# EAGLE board mainboard (EAGLE 9.6.2)
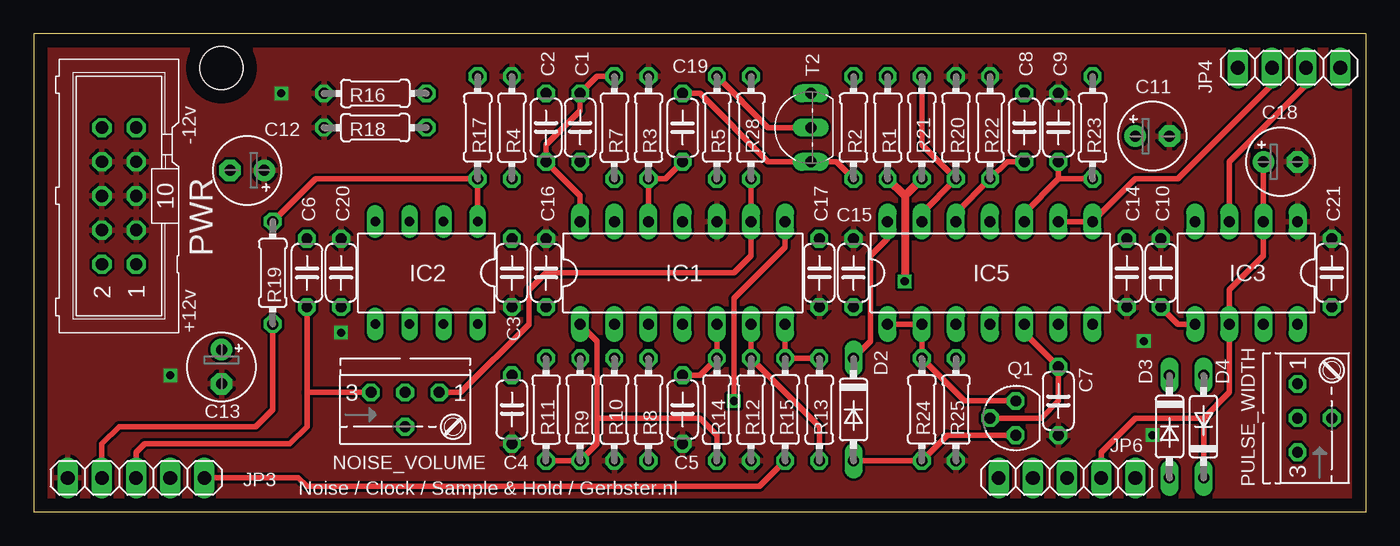
[diagram p0: board, top side]
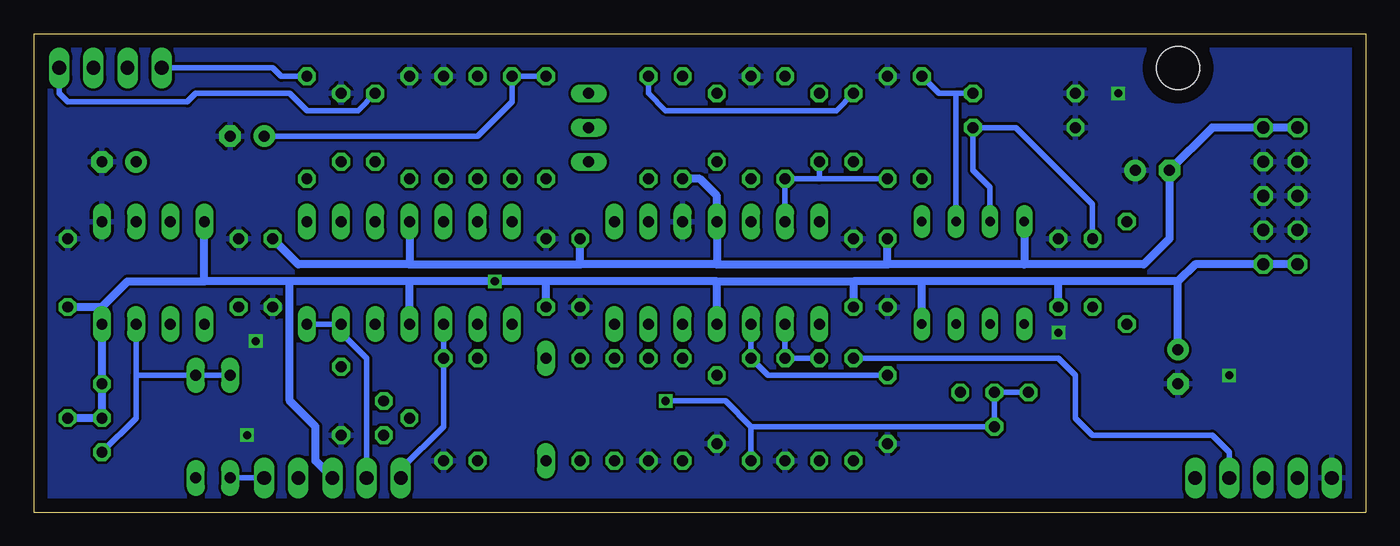
[diagram p1: board, bottom side, seen from below]

Size 99.06 x 35.56 mm. Coordinates in mm from the lower left corner, seen from the top.
Outline: 99.06,0 0,0 0,35.56 99.06,35.56 99.06,0
Copper layers (1*16): Top 0.035mm / dielectric 1.5mm / Bottom 0.035mm
Design rules "default": minimum track width 10mil, minimum drill 24mil, track to track 8mil, track to pad 8mil, pad to pad 8mil, via to via 8mil, smd to smd 8mil, copper to edge 40mil, drill to drill 8mil, minimum pad ring 10mil, minimum via ring 8mil, stop-mask expansion 4mil, vias tented up to drill 0mil, thermal gap 10mil
Holes 3.2 mm at 13.97,33.02

## Footprints (pad centres in the part's own frame; a part is rotated, then mirrored left to right if it is on the bottom)
C050-024X044 = drill 0.813 octagon: 1 -2.54,0; 2 2.54,0
E2,5-5 = drill 0.813 pad 1.6: + -1.27,0 | drill 0.813 pad 1.6 octagon: - 1.27,0
DO35-7 = drill 0.813 long: A 3.81,0; C -3.81,0
DIL14 = drill 0.813 long: 1 -7.62,-3.81; 2 -5.08,-3.81; 3 -2.54,-3.81; 4 0,-3.81; 5 2.54,-3.81; 6 5.08,-3.81; 7 7.62,-3.81; 8 7.62,3.81; 9 5.08,3.81; 10 2.54,3.81; 11 0,3.81; 12 -2.54,3.81; 13 -5.08,3.81; 14 -7.62,3.81
DIL08 = drill 0.7 long: 1 -3.81,-3.81; 2 -1.27,-3.81; 3 1.27,-3.81; 4 3.81,-3.81; 5 3.81,3.81; 6 1.27,3.81; 7 -1.27,3.81; 8 -3.81,3.81
DIL-08 = drill 0.813 long: 1 -3.81,-3.81; 2 -1.27,-3.81; 3 1.27,-3.81; 4 3.81,-3.81; 5 3.81,3.81; 6 1.27,3.81; 7 -1.27,3.81; 8 -3.81,3.81
1X05 = drill 1.016 long: 1 -5.08,0; 2 -2.54,0; 3 0,0; 4 2.54,0; 5 5.08,0
1X04 = drill 1.016 long: 1 -3.81,0; 2 -1.27,0; 3 1.27,0; 4 3.81,0
S64YW = drill 0.813 octagon: A 2.54,1.27; E -2.54,1.27; S 0,-1.27; S@1 0,1.27
ML10 = drill 0.914 octagon: 1 -5.08,-1.27; 2 -5.08,1.27; 3 -2.54,-1.27; 4 -2.54,1.27; 5 0,-1.27; 6 0,1.27; 7 2.54,-1.27; 8 2.54,1.27; 9 5.08,-1.27; 10 5.08,1.27
SOT54C = drill 0.813 octagon: D 1.27,0; G -1.27,0; S 0,1.905
0204/7 = drill 0.813 octagon: 1 -3.81,0; 2 3.81,0
TO92-EBC = drill 0.813 long: B 0,-1.27; C 2.54,-1.27; E -2.54,-1.27

## Placement (x,y rotation side)
C1  22pf  [C050-024X044]  40.64,28.57 90 top
C2  .1uf  [C050-024X044]  38.1,28.57 90 top
C3  [C050-024X044]  35.56,17.78 90 top
C4  0.1uf  [C050-024X044]  35.56,7.62 90 top
C5  0.22uf  [C050-024X044]  48.26,7.62 90 top
C6  0.1uf  [C050-024X044]  20.32,17.78 270 top
C7  0.1uf  [C050-024X044]  76.2,8.26 90 top
C8  0.001uf  [C050-024X044]  73.66,28.57 90 top
C9  0.1uf  [C050-024X044]  76.2,28.57 270 top
C10  0.022uf  [C050-024X044]  83.82,17.78 270 top
C11  1uf  [E2,5-5]  83.19,27.94 0 top
C12  [E2,5-5]  15.88,25.4 180 top
C13  [E2,5-5]  13.97,10.79 270 top
C14  [C050-024X044]  81.28,17.78 90 top
C15  [C050-024X044]  58.42,17.78 90 top
C16  [C050-024X044]  38.1,17.78 270 top
C17  [C050-024X044]  60.96,17.78 270 top
C18  1.0uf  [E2,5-5]  92.71,26.04 0 top
C19  .1uf  [C050-024X044]  48.26,28.57 270 top
C20  [C050-024X044]  22.86,17.78 270 top
C21  [C050-024X044]  96.52,17.78 90 top
D2  1N4148DO35-7  [DO35-7]  60.96,7.62 270 top
D3  [DO35-7]  84.45,6.35 270 top
D4  [DO35-7]  87,6.35 90 top
IC1  TL074P  [DIL14]  48.26,17.78 0 top
IC2  TL072P  [DIL08]  29.21,17.78 180 top
IC3  NE555  [DIL-08]  90.17,17.78 180 top
IC5  TL074P  [DIL14]  71.12,17.78 0 top
JP3  [1X05]  7.62,2.54 0 top
JP4  [1X04]  93.34,33.02 0 top
JP6  [1X05]  76.83,2.54 180 top
NOISE_VOLUME  500k  [S64YW]  27.62,7.62 0 top
PULSE_WIDTH  10k  [S64YW]  95.25,6.99 90 top
PWR  [ML10]  6.35,23.5 90 top
Q1  BF245  [SOT54C]  73.03,6.99 90 top
R1  470k  [0204/7]  63.5,28.57 270 top
R2  470k  [0204/7]  60.96,28.57 90 top
R3  2M  [0204/7]  45.72,28.57 270 top
R4  10k  [0204/7]  35.56,28.57 270 top
R5  10k  [0204/7]  50.8,28.57 90 top
R7  470k  [0204/7]  43.18,28.57 270 top
R8  10k  [0204/7]  45.72,7.62 270 top
R9  220k  [0204/7]  40.64,7.62 90 top
R10  15k  [0204/7]  43.18,7.62 270 top
R11  10k  [0204/7]  38.1,7.62 270 top
R12  15k  [0204/7]  53.34,7.62 270 top
R13  100k  [0204/7]  58.42,7.62 270 top
R14  10k  [0204/7]  50.8,7.62 270 top
R15  10k  [0204/7]  55.88,7.62 90 top
R16  15k  [0204/7]  25.4,31.11 180 top
R17  220k  [0204/7]  33.02,28.57 90 top
R18  10k  [0204/7]  25.4,28.57 0 top
R19  10k  [0204/7]  17.78,17.78 90 top
R20  10k  [0204/7]  68.58,28.57 90 top
R21  100k  [0204/7]  66.04,28.57 90 top
R22  100k  [0204/7]  71.12,28.57 270 top
R23  10k  [0204/7]  78.74,28.57 90 top
R24  1M  [0204/7]  66.04,7.62 90 top
R25  100k  [0204/7]  68.58,7.62 90 top
R28  10k  [0204/7]  53.34,28.57 90 top
T2  [TO92-EBC]  56.52,28.57 90 top

## Library data of the parts
C1-C21 R1-R5 R7-R25 R28 = resistor
D2-D4 = diode
IC1 IC5 = linear
IC2 = TomW
IC3 = st-microelectronics; MF: Arrow Electronics; MPN: NE555N; OC_FARNELL: 1467742; OC_NEWARK: 89K1486
JP3 JP4 JP6 = pinhead
NOISE_VOLUME PULSE_WIDTH = pot
PWR = con-ml; OC_FARNELL: unknown; OC_NEWARK: unknown
Q1 = transistor-small-signal
T2 = transistor-neu-to92

## Nets
+12V: C13.+ C16.2 C17.2 C20.2 C21.1 IC1.4 IC2.8 IC3.4 IC3.8 IC5.4 JP6.3 PULSE_WIDTH.A PULSE_WIDTH.S PWR.1 PWR.2 R1.2 R21.1
-12V: C3.2 C12.- C14.2 C15.2 IC1.11 IC2.4 IC5.11 PWR.9 PWR.10 R5.1
GND: C3.1 C4.1 C5.1 C7.1 C9.1 C10.1 C11.- C12.+ C13.- C14.1 C15.1 C16.1 C17.1 C18.- C20.1 C21.2 IC1.10 IC3.1 JP3.1 PWR.3 PWR.4 PWR.5 PWR.6 PWR.7 PWR.8 R3.1 R4.1 R10.2 R12.2 R16.2 R18.1 R20.2 R22.1 R25.1
M_BLUE_OUT: JP3.2 R19.1
M_CLK_CTRL_1: D3.A JP6.1
M_CLK_CTRL_2: C18.+ D4.C IC3.2 IC3.6 JP6.2
M_CLK_IN: C8.2 JP4.4
M_CLK_OUT: IC3.3 JP4.3
M_GLIDE_A: IC5.6 IC5.7 JP6.4
M_GLIDE_B: JP4.1 R23.2
M_PINK_OUT: JP3.4 R11.1
M_RED_OUT: JP3.5 R15.1
M_SH_OUT: IC5.8 IC5.9 JP4.2
M_SIGNAL_IN: IC5.3 JP6.5 R25.2
M_WHITE_OUT: C6.2 IC1.8 JP3.3 NOISE_VOLUME.E NOISE_VOLUME.S R8.2
N$1: C19.1 R2.1 T2.E
N$2: C11.+ R1.1 R2.2
N$3: R5.2 T2.B
N$4: C19.2 IC1.12 R3.2
N$5: C1.1 IC1.13 R4.2 R7.2
N$6: C1.2 C2.1 IC1.14 R7.1
N$7: C2.2 R28.2
N$10: C4.2 IC1.3 R8.1
N$11: IC1.2 R9.2 R10.1
N$12: IC1.1 R9.1 R11.2 R14.2
N$13: IC5.1 IC5.2 Q1.D R24.2
N$16: IC1.6 R12.1 R13.2
N$17: IC1.7 R13.1 R15.2
N$18: C5.2 IC1.5 R14.1
N$19: D3.C D4.A IC3.7 PULSE_WIDTH.E
N$20: C6.1 IC2.3 R18.2
N$21: IC2.2 R16.1 R17.2
N$22: IC2.1 R17.1 R19.2
N$23: C10.2 IC3.5
N$24: IC5.13 R20.1 R21.2
N$25: C8.1 IC5.12 R22.2
N$26: IC1.9 NOISE_VOLUME.A R28.1
N$29: D2.C IC5.14
N$30: D2.A Q1.G R24.1
N$31: C7.2 IC5.5 Q1.S
N$33: C9.2 IC5.10 R23.1

## Tracks (layer width: path | path; a pad name or v marks a point on that pad's centre or on a via)
+12V  (via drill 0.6)
  Top 0.61: R21.1 64.77,23.5 | 64.77,23.5 v64.77,17.14 | R1.2 64.77,23.5
  Bottom 0.61: C13.+ 13.97,17.14 | PWR.2 PWR.1 12.7,18.41 13.97,17.14 | 13.97,17.14 22.86,17.14 | C20.2 22.86,17.14 | 22.86,17.14 33.02,17.14 | IC2.8 33.02,17.14 | 33.02,17.14 38.1,17.14 | 38.1,17.14 C16.2 | 48.26,17.14 38.1,17.14 | IC1.4 48.26,17.14 | 48.26,17.14 60.96,17.14 | C17.2 60.96,17.14 | 60.96,17.14 v64.77,17.14 71.12,17.14 | IC5.4 71.12,17.14 | 71.12,17.14 80.01,17.14 | 80.01,17.14 86.36,17.14 | 86.36,17.14 IC3.4 | 93.98,15.24 92.08,17.14 86.36,17.14 | 93.98,15.24 IC3.8 PULSE_WIDTH.A 93.98,6.99 PULSE_WIDTH.S | 93.98,15.24 C21.1 | JP6.3 78.11,3.81 78.11,6.35 80.01,8.26 80.01,17.14
-12V
  Bottom 0.61: PWR.10 PWR.9 11.43,28.57 C12.- 14.61,20.32 16.51,18.41 25.4,18.41 | IC2.4 25.4,18.41 | 25.4,18.41 35.56,18.41 | 35.56,18.41 C3.2 | 48.26,18.41 35.56,18.41 | 48.26,18.41 IC1.11 48.26,23.5 49.53,24.77 R5.1 | 48.26,18.41 58.42,18.41 | 58.42,18.41 C15.2 | 71.12,18.41 58.42,18.41 | IC5.11 71.12,18.41 | 71.12,18.41 79.38,18.41 C14.2
GND  (via drill 0.6)
  other vias: 18.41,31.11 10.16,10.16 22.86,13.34 82.55,12.7 83.19,5.71
  pour Top: 0,35.56 0,0 99.06,0 99.06,35.56
  pour Bottom: 0,35.56 0,0 99.06,0 99.06,35.56
M_BLUE_OUT
  Top 0.406: R19.1 17.78,7.62 16.51,6.35 6.35,6.35 5.08,5.08 JP3.2
M_CLK_CTRL_1
  Bottom 0.406: JP6.1 D3.A
M_CLK_CTRL_2
  Top 0.406: C18.+ IC3.2 91.44,19.05 88.9,16.51 IC3.6 88.9,8.89 87,6.99 | 87,6.99 D4.C | JP6.2 79.38,4.45 81.92,6.99 87,6.99
M_CLK_IN
  Bottom 0.406: C8.2 74.93,29.84 78.74,29.84 80.01,31.11 87,31.11 87.63,30.48 96.52,30.48 97.16,31.11 JP4.4
M_CLK_OUT
  Top 0.406: JP4.3 94.61,31.75 88.9,26.04 IC3.3
M_GLIDE_A
  Bottom 0.406: IC5.7 IC5.6 76.2,13.34 74.3,11.43 JP6.4
M_GLIDE_B
  Bottom 0.406: R23.2 80.64,32.38 81.28,33.02 JP4.1
M_PINK_OUT
  Bottom 0.406: R11.1 22.86,11.43 21.59,10.16 21.59,6.99 20.32,5.71 11.43,5.71 10.16,4.45 JP3.4
M_RED_OUT
  Top 0.406: JP3.5 19.68,2.54 20.32,1.91 53.98,1.91 R15.1
M_SH_OUT
  Top 0.406: IC5.9 IC5.8 81.92,24.77 85.09,24.77 92.08,31.75 JP4.2
M_SIGNAL_IN
  Bottom 0.406: IC5.3 R25.2 68.58,6.35 71.75,3.17 JP6.5
M_WHITE_OUT  (via drill 0.6)
  Top 0.406: NOISE_VOLUME.E 20.32,8.89 | 20.32,8.89 20.32,6.35 19.05,5.08 8.26,5.08 7.62,4.45 JP3.3 | C6.2 20.32,8.89 | IC1.8 55.88,19.68 52.07,15.88 v52.07,8.26
  Bottom 0.406: NOISE_VOLUME.E 27.62,8.89 NOISE_VOLUME.S 45.72,6.35 | v52.07,8.26 47.62,8.26 45.72,6.35 | 45.72,6.35 R8.2
N$1
  Top 0.406: R2.1 59.69,26.04 T2.E 54.61,26.04 49.53,31.11 C19.1
N$2
  Bottom 0.406: R2.2 R1.1 63.5,30.48 66.04,27.94 C11.+
N$3
  Top 0.406: R5.2 54.61,28.57 T2.B
N$4
  Top 0.406: IC1.12 R3.2 46.99,24.77 C19.2
N$5
  Bottom 0.406: IC1.13 R7.2 40.64,24.77 | R4.2 40.64,24.77 | C1.1 40.64,24.77
N$6
  Top 0.406: IC1.14 40.64,23.5 C2.1 38.1,27.3 40.64,29.84 C1.2 41.91,32.38 R7.1
N$7
  Bottom 0.406: R28.2 53.34,31.11 52.07,29.84 39.37,29.84 C2.2
N$10
  Bottom 0.406: IC1.3 R8.1 44.45,10.16 C4.2
N$11
  Bottom 0.406: IC1.2 R10.1 R9.2
N$12
  Top 0.406: IC1.1 41.91,12.7 41.91,6.99 | 41.91,6.99 41.91,5.08 R9.1 R11.2 | R14.2 50.8,5.71 49.53,6.99 41.91,6.99
N$13
  Top 0.406: IC5.1 IC5.2 R24.2 69.22,8.26 Q1.D
N$16
  Top 0.406: IC1.6 R12.1 58.42,6.35 R13.2
N$17
  Top 0.406: IC1.7 R15.2 R13.1
N$18
  Top 0.406: IC1.5 R14.1 49.53,10.16 C5.2
N$19
  Bottom 0.406: D3.C D4.A 91.44,10.16 | IC3.7 91.44,10.16 | PULSE_WIDTH.E 91.44,6.99 91.44,10.16
N$20
  Bottom 0.406: C6.1 20.32,22.86 26.04,28.57 R18.2 29.21,25.4 27.94,24.13 IC2.3
N$21
  Bottom 0.406: R16.1 30.48,31.11 | R17.2 31.75,31.11 30.48,31.11 | 30.48,31.11 IC2.2
N$22
  Top 0.406: R19.2 20.95,24.77 R17.1 IC2.1
N$23
  Top 0.406: C10.2 85.09,13.97 IC3.5
N$24
  Top 0.406: IC5.13 66.04,22.23 R20.1 66.04,27.3 R21.2
N$25
  Top 0.406: IC5.12 68.58,22.23 R22.2 72.39,26.04 C8.1
N$26
  Top 0.406: R28.1 IC1.9 53.34,19.05 52.07,17.78 38.1,17.78 36.83,16.51 36.83,13.97 31.75,8.89 NOISE_VOLUME.A
N$29
  Top 0.406: IC5.14 63.5,20.32 62.23,19.05 62.23,12.7 D2.C
N$30
  Top 0.406: Q1.G 67.94,5.71 R24.1 D2.A
N$31
  Top 0.406: IC5.5 73.66,13.34 C7.2 76.2,8.26 74.93,6.99 Q1.S
N$33
  Top 0.406: IC5.10 73.66,22.23 76.2,24.77 | 76.2,24.77 C9.2 | R23.1 76.2,24.77

## Text on the board
tNames: -12v | +12v | Noise / Clock / Sample & Hold / Gerbster.nl